# Altium PCB TrafficLight.PcbDoc
Units mil, origin at the board's own origin, x right, y up, seen from the top; angles counter-clockwise.
Board outline 2120.67 x 2088.72 mil, 2 copper layers (Top Layer, Bottom Layer); 58 components, 52 nets, 169 pads, 34 vias.
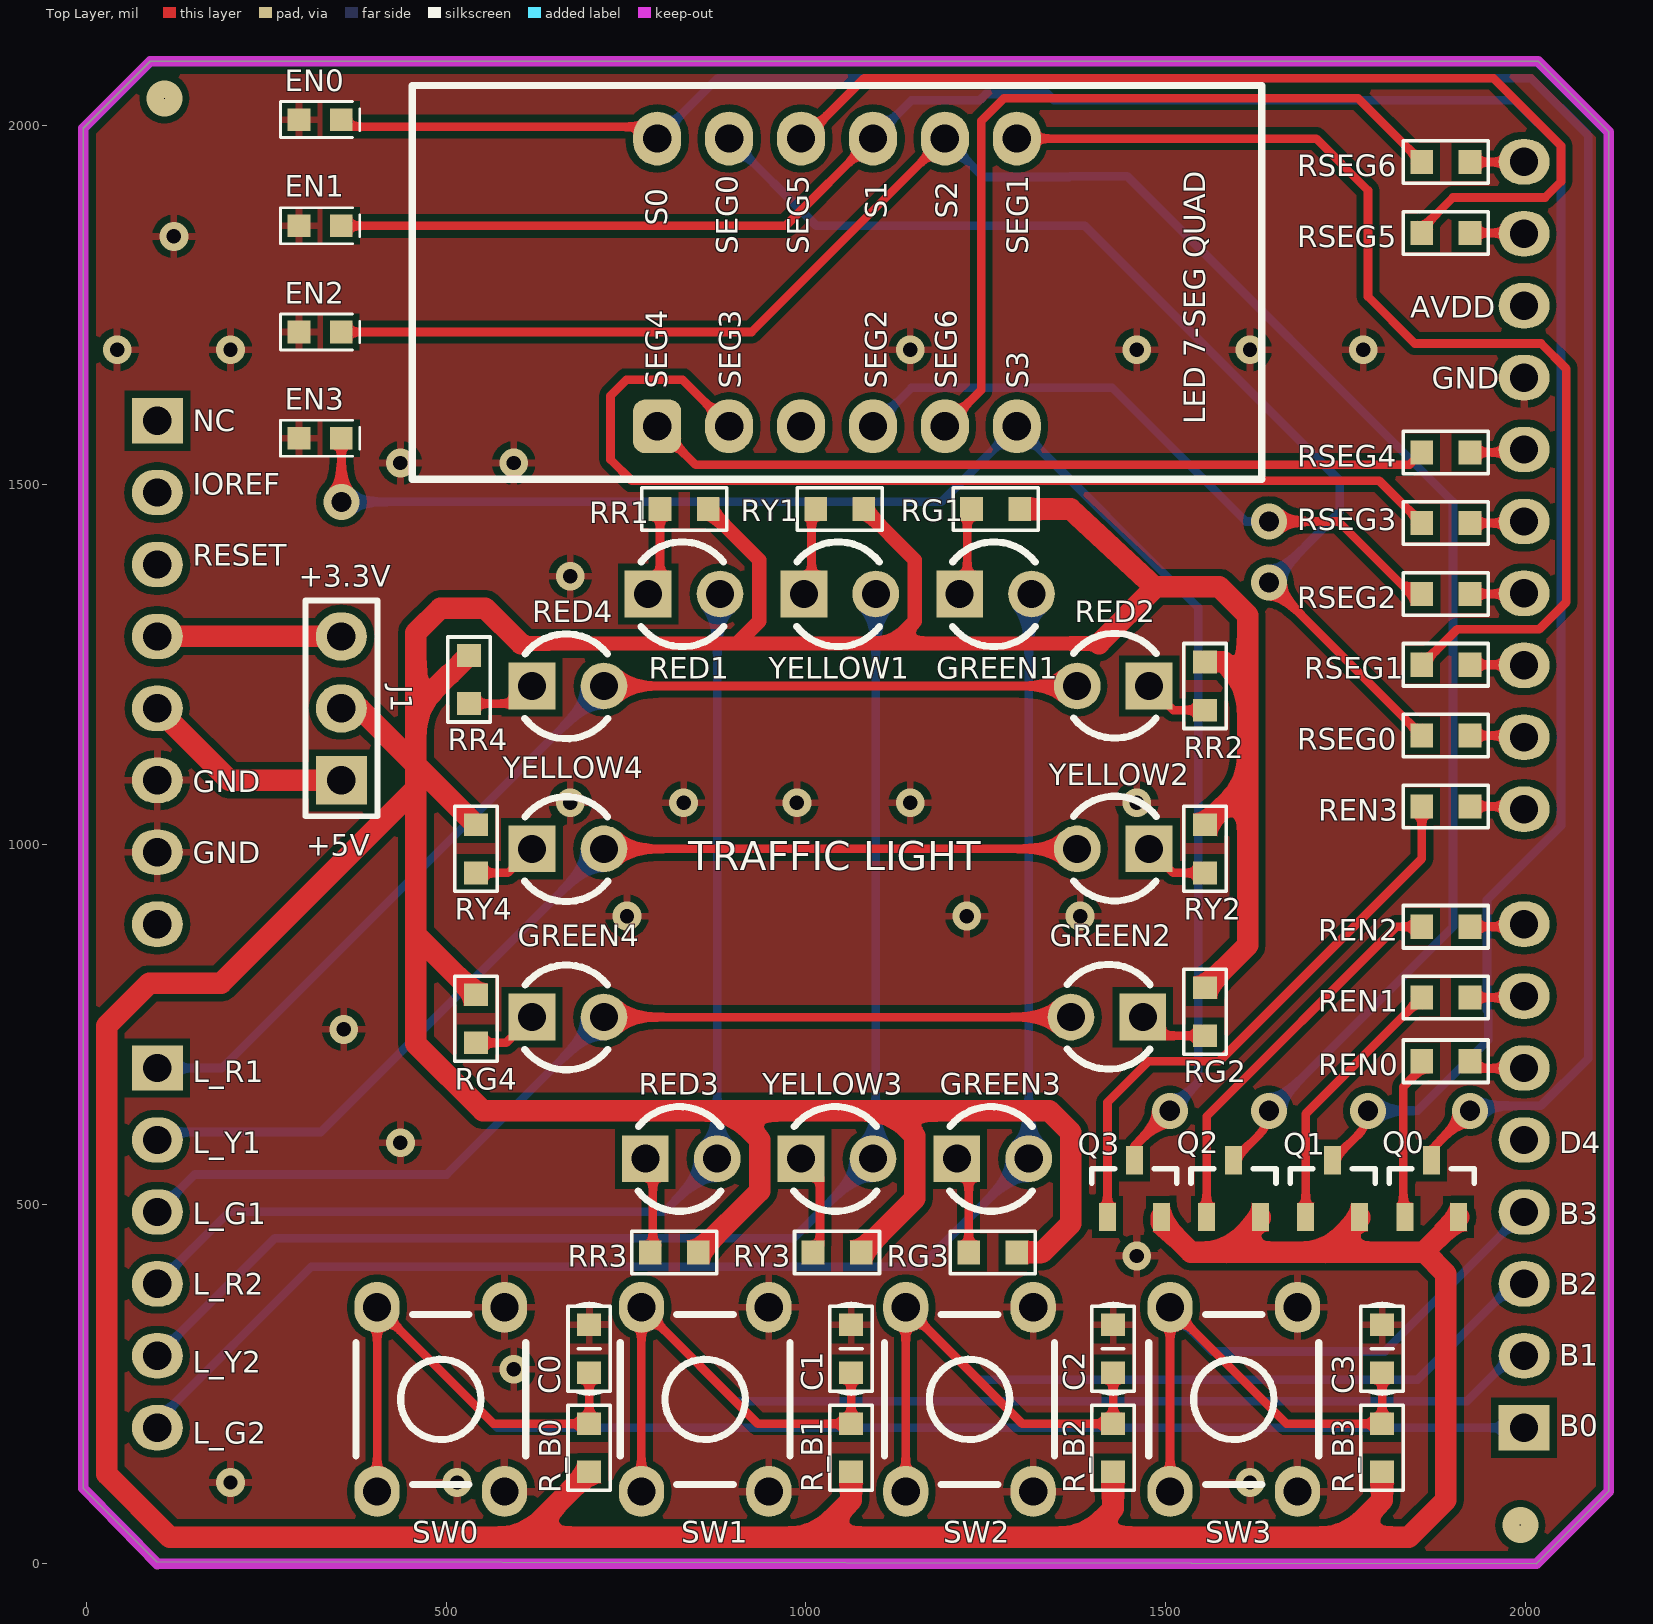
[diagram p0: Top Layer view]
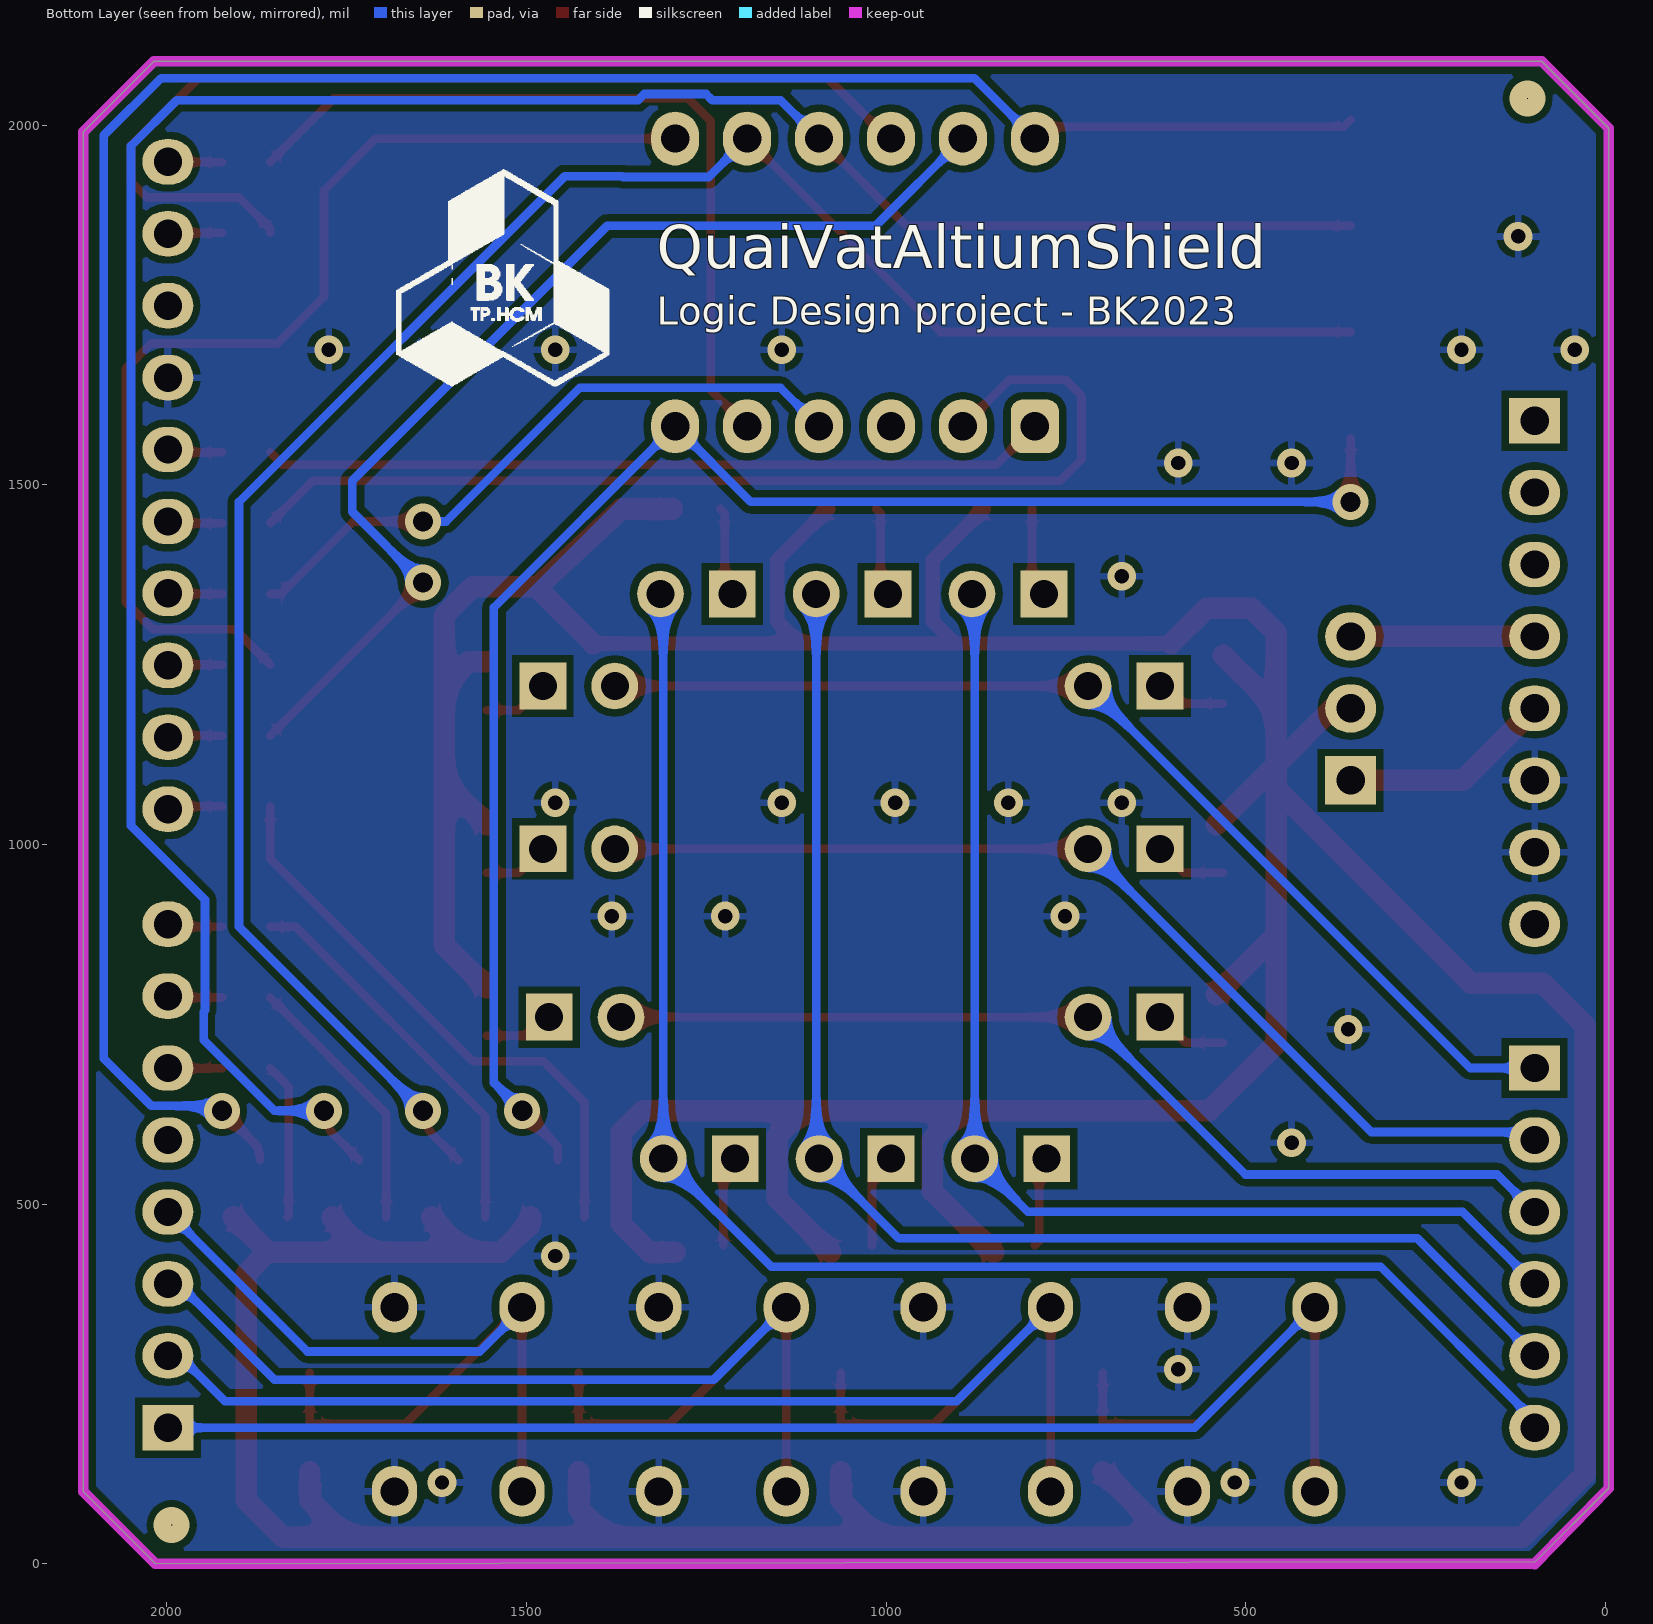
[diagram p1: Bottom Layer view, seen from below]
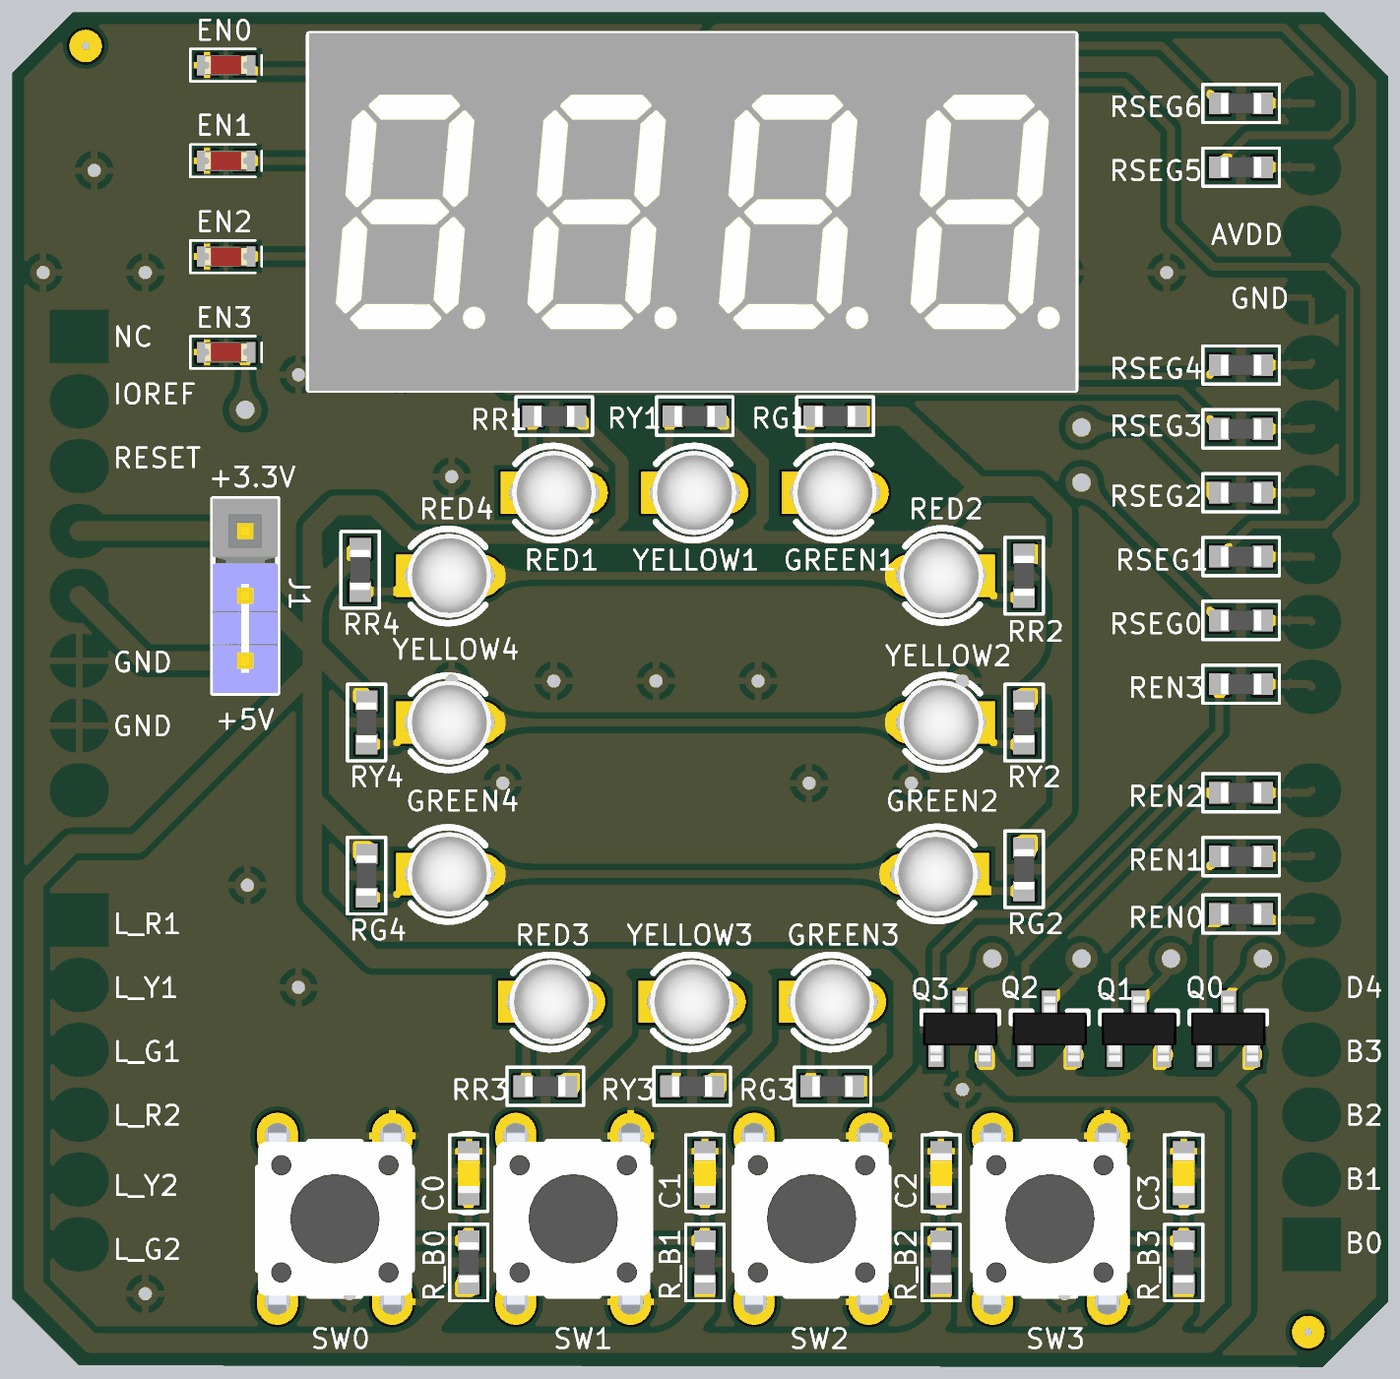
[diagram p2: 3D render of the assembled board from above, using the file's embedded part models]

## Layer stack, top to bottom
Top Solder: solder mask 0.4, Solder Resist, Dk 3.5
Top Layer: signal copper 1.4
Dielectric 1: dielectric 12.6, FR-4, Dk 4.8
Bottom Layer: signal copper 1.4
Bottom Solder: solder mask 0.4, Solder Resist, Dk 3.5

## Board outline
-4.53,105.31 -4.53,1995.87 88.58,2088.98 2017.72,2088.98 2116.14,1990.55 2116.14,100.79 2015.61,0.26 97.9,2.89

## Design rules (kind name [scope] priority, off if disabled: settings)
Clearance [All] p1: gap=10 ignorepadtopadclearanceinfootprint=FALSE except(0: Arc-Hole Track-Hole SMDPad-Hole THPad-Hole Via-Hole Fill-Hole Poly-Hole Region-Hole Text-Hole)
ComponentClearance [InComponent('Traffic Light Shield')] p1: gap=0 collisioncheckmode=3 verticalgap=0 showdistances=FALSE
PolygonConnect [All] p1: connectstyle=Relief reliefconductorwidth=10 reliefentries=4 polygonreliefangle="90 Angle" airgapwidth=10
RoutingVias [All] p1: holewidth=28 width=50 viastyle="Through Hole" minholewidth=28 minwidth=50 maxholewidth=28 maxwidth=50
SolderMaskExpansion [All] p1: expansion=4
Width [All] p1: maxlimit=30 minlimit=10 preferedwidth=12 minimp=50.000000 maximp=50.000000 favimp=50.000000
29 further rules are at their usual default settings.

## Components (designator, comment, footprint, x,y, rotation, side; value= is the part's Value field where it differs from the comment)
C0 "104" "C 0603" 698.82,299.21 r90 top
C1 "104" "C 0603" 1062.99,299.21 r90 top
C2 "104" "C 0603" 1427.17,299.21 r90 top
C3 "104" "C 0603" 1801.18,299.21 r90 top
EN0 "Led" "Led 0603 - red" 324.8,2007.87 r180 top
EN1 "Led" "Led 0603 - red" 324.8,1860.24 r180 top
EN2 "Led" "Led 0603 - red" 324.8,1712.6 r180 top
EN3 "Led" "Led 0603 - red" 324.8,1564.96 r180 top
GREEN1 "Led" "LED 3MM - green" 1263.78,1348.43 r0 top
GREEN2 "Led" "LED 3MM - green" 1418.5,760.24 r180 top
GREEN3 "Led" "LED 3MM - green" 1259.84,563.39 r0 top
GREEN4 "Led" "LED 3MM - green" 669.29,760.24 r0 top
J1 "JUMP 3" JUMP3 354.33,1089.37 r90 top
"LED 7-SEG QUAD" "LED 7-SEG QUAD" "LED/7SEG/0.36/QUAD 3641" 1043.31,1781.5 r0 top
Q0 "Transistor PNP" SOT-23 1870.08,521.65 r90 top
Q1 "Transistor PNP" SOT-23 1732.28,521.65 r90 top
Q2 "Transistor PNP" SOT-23 1594.49,521.65 r90 top
Q3 "Transistor PNP" SOT-23 1456.69,521.65 r90 top
R_B0 "10k" "R 0603" 698.82,161.42 r270 top
R_B1 "10k" "R 0603" 1062.99,161.42 r270 top
R_B2 "10k" "R 0603" 1427.17,161.42 r270 top
R_B3 "10k" "R 0603" 1801.18,161.42 r270 top
RED1 "Led" "LED 3MM - red" 830.71,1348.43 r0 top
RED2 "Led" "LED 3MM - red" 1427.17,1220.47 r180 top
RED3 "Led" "LED 3MM - red" 826.77,563.39 r0 top
RED4 "Led" "LED 3MM - red" 669.29,1220.47 r0 top
REN0 "4.7k" "R 0603" 1889.76,698.82 r180 top
REN1 "4.7k" "R 0603" 1889.76,787.4 r180 top
REN2 "4.7k" "R 0603" 1889.76,885.83 r180 top
REN3 "4.7k" "R 0603" 1889.76,1053.15 r180 top
RG1 "270" "R 0603" 1263.78,1466.54 r0 top
RG2 "270" "R 0603" 1555.12,767.72 r270 top
RG3 "270" "R 0603" 1259.84,433.07 r0 top
RG4 "220" "R 0603" 541.34,757.87 r270 top
RR1 "330" "R 0603" 830.71,1466.54 r0 top
RR2 "330" "R 0603" 1555.12,1220.47 r270 top
RR3 "330" "R 0603" 816.93,433.07 r0 top
RR4 "330" "R 0603" 531.5,1229.53 r270 top
RSEG0 "220" "R 0603" 1889.76,1151.57 r180 top
RSEG1 "220" "R 0603" 1889.76,1250 r180 top
RSEG2 "220" "R 0603" 1889.76,1348.43 r180 top
RSEG3 "220" "R 0603" 1889.76,1446.85 r180 top
RSEG4 "220" "R 0603" 1889.76,1545.28 r180 top
RSEG5 "220" "R 0603" 1889.76,1850.39 r180 top
RSEG6 "220" "R 0603" 1889.76,1948.82 r180 top
RY1 "300" "R 0603" 1047.24,1466.54 r0 top
RY2 "300" "R 0603" 1555.12,994.09 r270 top
RY3 "300" "R 0603" 1043.31,433.07 r0 top
RY4 "300" "R 0603" 541.34,994.09 r270 top
SW0 "Button" SW/4/06MM 492.52,228.74 r0 top
SW1 "Button" SW/4/06MM 859.97,228.74 r0 top
SW2 "Button" SW/4/06MM 1227.43,228.74 r0 top
SW3 "Button" SW/4/06MM 1594.88,228.74 r0 top
"TRAFFIC LIGHT" "NUCLEO-F103RB" NUCLEO -329.53,69.68 r0 top locked
YELLOW1 "Led" "LED 3MM - yellow" 1047.24,1348.43 r0 top
YELLOW2 "Led" "LED 3MM - yellow" 1427.17,994.09 r180 top
YELLOW3 "Led" "LED 3MM - yellow" 1043.31,563.39 r0 top
YELLOW4 "Led" "LED 3MM - yellow" 669.29,994.09 r0 top

## Footprints (in the part's own frame and the unit in brackets; to place one, negate y for a bottom-side part, rotate by r counter-clockwise, add the part's x,y. Pads: shape width x height; smd on the part's side, far side on the other; paste and mask are expansions set on the pad)
"C 0603" [mm] "Chip Capacitor, 2-Leads, Body 1.6x0.8mm, IPC Medium Density"
  rect 0.8x0.85 smd: 1(-0.85,0) 2(0.85,0)
  silkscreen extent -1.6,-0.75 1.6,0.75, body extent -0.8,-0.43 0.8,0.43, height 0.81
JUMP3 [mm]
  rect 1.7x1.8 hole 1: 1(0,0)
  oval 1.7x1.8 hole 1: 2(2.54,0) 3(5.08,0)
  silkscreen extent -1.27,-1.27 6.35,1.27, body extent -1.27,-1.27 6.35,1.27, height 8.89
"LED 3MM - green" [mil]
  rect 65x65 hole 39: 1(-50,0)
  round 65 hole 39: 2(50,0)
  silkscreen extent -60,-73 55,72, body extent -66,-65 64,65, height 207
"LED 3MM - red" [mil]
  rect 65x65 hole 39: 1(-50,0)
  round 65 hole 39: 2(50,0)
  silkscreen extent -60,-73 55,72, body extent -66,-65 64,65, height 207
"LED 3MM - yellow" [mil]
  rect 65x65 hole 39: 1(-50,0)
  round 65 hole 39: 2(50,0)
  silkscreen extent -60,-73 55,72, body extent -66,-65 64,65, height 207
"Led 0603 - red" [mm] "Led SMD 0603"
  rect 0.8x0.8 smd: 1(-0.75,0) 2(0.75,0)
  silkscreen extent -1.4,-0.64 1.4,0.64, body extent -0.81,-0.4 0.81,0.4, height 0.6
"LED/7SEG/0.36/QUAD 3641" [mm]
  rrect50% 1.7x1.9 hole 1: 1(-6.35,-5.08)
  oval 1.7x1.9 hole 1: 2(-3.81,-5.08) 3(-1.27,-5.08) 4(1.27,-5.08) 5(3.81,-5.08) 6(6.35,-5.08) 7(6.35,5.08) 8(3.81,5.08) 9(1.27,5.08) 10(-1.27,5.08) 11(-3.81,5.08) 12(-6.35,5.08)
  silkscreen extent -15,-6.95 15,6.95, body extent -14.99,-7 15.01,7, height 7.1
NUCLEO [mm]
  oval 1.8x1.6 hole 1: A5_1(59.13,24.88) A5_2(59.13,27.42) A5_3(59.13,29.96) A5_4(59.13,32.5) A5_5(59.13,35.04) A5_6(59.13,37.58) A5_7(59.13,40.12) A5_8(59.13,42.66) A5_9(59.13,45.2) A5_10(59.13,47.74) A6_2(10.87,36.06) A6_3(10.87,33.52) A6_4(10.87,30.98) A6_5(10.87,28.44) A6_6(10.87,25.9) A6_7(10.87,23.36) A6_8(10.87,20.82) A8_2(10.87,13.2) A8_3(10.87,10.66) A8_4(10.87,8.12) A8_5(10.87,5.58) A8_6(10.87,3.04) A9_2(59.13,5.58) A9_3(59.13,8.12) A9_4(59.13,10.66) A9_5(59.13,13.2) A9_6(59.13,15.74) A9_7(59.13,18.28) A9_8(59.13,20.82)
  rect 1.8x1.6 hole 1: A6_1(10.87,38.6) A8_1(10.87,15.74) A9_1(59.13,3.04)
  Keep-Out Layer lines w0.381: 8.255,0.905 8.255,48.925 10.62,51.29 ; 59.566,-1.764 62.12,0.79 62.12,48.79 59.62,51.29
"R 0603" [mm] "Chip Resistor, 2-Leads, Body 1.6x0.8mm, IPC Medium Density"
  rect 0.8x0.85 smd: 1(-0.85,0) 2(0.85,0)
  silkscreen extent -1.5,-0.75 1.5,0.75, body extent -0.8,-0.4 0.8,0.4, height 0.5
SOT-23 [mm] "SOT23, 3-Leads, Body 3.0x2.5mm (max), Pitch 0.95mm, IPC Medium Density"
  rect 1x0.6 smd: 1(-1,0.95) 2(-1,-0.95) 3(1,0)
  silkscreen extent 0.2,-1.5 0.7,1.5, body extent -1.28,-1.46 1.27,1.46, height 0.95
SW/4/06MM [mm]
  oval 1.6x1.8 hole 1: 1(-2.25,3.25) 2(-2.25,-3.25) 3(2.25,-3.25) 4(2.25,3.25)
  silkscreen extent -3,-3 3,3, body extent -3.01,-3.87 3.02,3.87, height 5.01

## Part data
C0 C1 C2 C3: library part "Capacitor NP", "Capacitor non-pol"
EN0 EN1 EN2 EN3 GREEN1 GREEN2 GREEN3 GREEN4 RED1 RED2 RED3 RED4 YELLOW1 YELLOW2 YELLOW3 YELLOW4: "Typical LED"
"LED 7-SEG QUAD": library part "LED 7-SEG QUAD 0.36inch", "LED 7-SEG 0.36 QUAD RED"
Q0 Q1 Q2 Q3: "PNP Bipolar Transistor"
R_B0 R_B1 R_B2 R_B3 REN0 REN1 REN2 REN3 RG1 RG2 RG3 RG4 RR1 RR2 RR3 RR4 RSEG0 RSEG1 RSEG2 RSEG3 RSEG4 RSEG5 RSEG6 RY1 RY2 RY3 RY4: library part Resistor, "Resistor"
SW0 SW1 SW2 SW3: library part "SW SPST 4-pin", "Tact switch 4-pin"
"TRAFFIC LIGHT": library part "NUCLEO_Adruino only", "STM32F103RB, mbed-Enabled Development Nucleo-64 STM32F1 ARM® Cortex®-M3 MCU 32-Bit Embedded Evaluation Board", Manufacturer=STMicroelectronics, BRAND=STMicroelectronics, Manufacturer Product Number=NUCLEO-F103RB, PART NO=NUCLEO-F103RB, STOCK CODE=497-14362-ND, SUPPLIER=digi-key, TYPE="EVAL BRD"

## Via types
v1: diameter 40, hole 20, Top Layer to Bottom Layer, tented both sides, 25 vias
v2: diameter 50, hole 28, Top Layer to Bottom Layer, tented both sides, 7 vias
v3: diameter 50, hole 0, Top Layer to Bottom Layer, 2 vias

## Nets (pads, with @x,y where several pads share a name; then routed paths per layer and width w, separated by ;. In a path a pad name is that pad's centre, name@x,y a point inside that pad or via, vN(x,y) a via of type N, cw(c..) or ccw(c..) an arc to the next point about the centre after c; other vN are vias at no path point)
+3.3V: "TRAFFIC LIGHT.A6_4" J1.3 | length 255.9
  Top Layer w30: 98.43,1289.37 J1.3
+5V: "TRAFFIC LIGHT.A6_5" J1.1 | length 297.3
  Top Layer w30: 98.43,1189.37 198.43,1089.37 J1.1
BUTTON_0: "TRAFFIC LIGHT.A9_1" C0.1 R_B0.1 SW0.1 SW0.2 | length 2352.5
  Top Layer w12: SW0.2 SW0.1 565.75,194.88 R_B0.1 C0.1
  Bottom Layer w12: SW0.1 571.26,189.37 1998.43,189.37
BUTTON_1: "TRAFFIC LIGHT.A9_2" C1.1 R_B1.1 SW1.1 SW1.2 | length 1992.5
  Top Layer w12: SW1.2 SW1.1 933.2,194.88 R_B1.1 C1.1
  Bottom Layer w12: SW1.1 901.71,226.38 1919.29,226.38 1982.28,289.37 1998.43,289.37
BUTTON_2: "TRAFFIC LIGHT.A9_3" C2.1 R_B2.1 SW2.1 SW2.2 | length 1638.7
  Top Layer w12: SW2.2 SW2.1 1300.66,194.88 R_B2.1 C2.1
  Bottom Layer w12: SW2.1 1239.63,255.91 1850.39,255.91 1983.86,389.37 1998.43,389.37
BUTTON_3: "TRAFFIC LIGHT.A9_4" C3.1 R_B3.1 SW3.1 SW3.2 | length 1288.3
  Top Layer w12: SW3.2 SW3.1 1668.11,194.88 R_B3.1 C3.1
  Bottom Layer w12: SW3.1 1506.3,353.94 1564.96,295.28 1804.33,295.28 1998.43,489.37
EN0: "TRAFFIC LIGHT.A9_6" REN0.1 | length 75.4
  Top Layer w12: REN0.1@1923.23,688.98 1998.03,688.98 1998.43,689.37
EN1: "TRAFFIC LIGHT.A9_7" REN1.1 | length 76
  Top Layer w12: REN1.1 1996.46,787.4 1998.43,789.37
EN2: "TRAFFIC LIGHT.A9_8" REN2.1 | length 76.7
  Top Layer w12: REN2.1 1994.88,885.83 1998.43,889.37
EN3: "TRAFFIC LIGHT.A5_1" REN3.1 | length 76.8
  Top Layer w12: REN3.1 1994.49,1053.15 1998.43,1049.21
GND: "TRAFFIC LIGHT.A5_7" "TRAFFIC LIGHT.A6_6" "TRAFFIC LIGHT.A6_7" C0.2 C1.2 C2.2 C3.2 EN0.2 EN1.2 EN2.2 EN3.2 SW0.3 SW0.4 SW1.3 SW1.4 SW2.3 SW2.4 SW3.3 SW3.4
  other v1: 200.16,113.19 515.12,113.19 1617.48,113.19 593.86,270.67 1460,428.15 436.38,585.63 357.64,743.11 751.34,900.59 1223.78,900.59 1381.26,900.59 672.6,1058.07 830.08,1058.07 987.56,1058.07 1145.04,1058.07 1460,1058.07 672.6,1373.03 436.38,1530.51 593.86,1530.51 42.68,1687.99 200.16,1687.99 1145.04,1687.99 1460,1687.99 1617.48,1687.99 1774.96,1687.99 121.42,1845.47
LED_GREEN1: "TRAFFIC LIGHT.A8_6" GREEN1.2 GREEN3.2 | length 2158.8
  Bottom Layer w12: 98.43,189.37 98.43,199.21 312.6,413.39 1159.84,413.39 GREEN3.2 1309.84,1344.49 GREEN1.2
LED_GREEN2: "TRAFFIC LIGHT.A8_3" GREEN2.2 GREEN4.2 | length 1382.3
  Top Layer w12: GREEN4.2 GREEN2.2
  Bottom Layer w12: 98.43,489.37 150.39,541.34 500.39,541.34 GREEN4.2
LED_RED1: "TRAFFIC LIGHT.A8_4" RED1.2 RED3.2 | length 1637.1
  Bottom Layer w12: 98.43,389.37 198.43,489.37 802.76,489.37 RED3.2 876.77,1344.49 RED1.2
LED_RED2: "TRAFFIC LIGHT.A8_1" RED2.2 RED4.2 | length 1498.7
  Top Layer w12: RED4.2 RED2.2
  Bottom Layer w12: 98.43,689.37 188.19,689.37 RED4.2
LED_YELLOW1: "TRAFFIC LIGHT.A8_5" YELLOW1.2 YELLOW3.2 | length 1895.1
  Bottom Layer w12: 98.43,289.37 261.81,452.76 982.68,452.76 YELLOW3.2 1097.24,567.32 YELLOW1.2
LED_YELLOW2: "TRAFFIC LIGHT.A8_2" YELLOW2.2 YELLOW4.2 | length 1446.4
  Top Layer w12: YELLOW4.2 YELLOW2.2
  Bottom Layer w12: 98.43,589.37 107.09,589.37 118.11,600.39 325.59,600.39 YELLOW4.2
NetGREEN1_1: GREEN1.1 RG1.1 | length 125
  Top Layer w12: GREEN1.1 1224.41,1359.06 1224.41,1460.63 RG1.1
NetGREEN2_1: GREEN2.1 RG2.2 | length 97.4
  Top Layer w12: GREEN2.1 1494.49,734.25 RG2.2
NetGREEN3_1: GREEN3.1 RG3.1 | length 127.3
  Top Layer w12: GREEN3.1 1226.38,546.85 RG3.1@1226.38,442.91
NetGREEN4_1: GREEN4.1 RG4.2 | length 102.6
  Top Layer w12: RG4.2@531.5,724.41 583.46,724.41 GREEN4.1
"NetLED 7-SEG QUAD_1": "LED 7-SEG QUAD.1" RSEG4.2 | length 1092.2
  Top Layer w12: 793.31,1581.5 846.71,1528.09 1839.12,1528.09 RSEG4.2
"NetLED 7-SEG QUAD_2": "LED 7-SEG QUAD.2" RSEG3.2 | length 1454.2
  Top Layer w12: 893.31,1581.5 828.57,1646.23 750.56,1646.23 728.35,1624.02 728.35,1535.43 757.87,1505.91 1797.24,1505.91 RSEG3.2
"NetLED 7-SEG QUAD_4": "LED 7-SEG QUAD.4" RSEG2.2 | length 903.8
  Top Layer w12: v2(1643.7,1449.21) 1740.55,1449.21 1841.34,1348.43 RSEG2.2
  Bottom Layer w12: 1093.31,1581.5 1146.71,1634.9 1426.13,1634.9 1611.81,1449.21 v2(1643.7,1449.21)
"NetLED 7-SEG QUAD_5": "LED 7-SEG QUAD.5" RSEG6.2 | length 1107.5
  Top Layer w12: 1193.31,1581.5 1243.84,1632.03 1243.84,2005.92 1275.32,2037.4 1767.72,2037.4 RSEG6.2
"NetLED 7-SEG QUAD_7": "LED 7-SEG QUAD.7" RSEG1.2 | length 1544.4
  Top Layer w12: 1293.31,1981.5 1709.45,1981.5 1781.5,1909.45 1781.5,1761.81 1846.6,1696.71 2022.04,1696.71 2057.09,1661.66 2057.09,1336.77 2019.53,1299.21 1905.51,1299.21 RSEG1.2
"NetLED 7-SEG QUAD_10": "LED 7-SEG QUAD.10" RSEG5.2 | length 1404.7
  Top Layer w12: 1009.65,1974.21 1009.65,1993.9 1081.22,2065.48 1955.88,2065.48 2049.86,1971.5 2049.86,1921.91 2027.56,1899.61 1899.61,1899.61 1856.3,1856.3 RSEG5.2
"NetLED 7-SEG QUAD_11": "LED 7-SEG QUAD.11" RSEG0.2 | length 1529
  Top Layer w12: v2(1643.7,1364.17) RSEG0.2
  Bottom Layer w12: 893.31,1981.5 1014.57,1860.24 1387.8,1860.24 1742.13,1505.91 1742.13,1462.6 v2(1643.7,1364.17)
NetQ0_1: Q0.1 REN0.2 | length 218.1
  Top Layer w12: Q0.1 1830.71,484.25 1830.71,663.39 REN0.2@1856.3,688.98
NetQ1_1: Q1.1 REN1.2 | length 372
  Top Layer w12: Q1.1 1694.88,625.98 REN1.2
NetQ2_1: Q2.1 REN2.2 | length 548.2
  Top Layer w12: Q2.1 1557.09,622.05 1820.87,885.83 REN2.2
NetQ3_1: Q3.1 REN3.2 | length 809.5
  Top Layer w12: Q3.1 1419.29,641.73 1476.38,698.82 1574.8,698.82 1856.3,980.32 REN3.2
NetRED1_1: RED1.1 RR1.1 | length 125
  Top Layer w12: RED1.1 797.24,1364.96 RR1.1
NetRED2_1: RED2.1 RR2.2 | length 91.8
  Top Layer w12: RED2.1 1510.63,1187.01 RR2.2
NetRED3_1: RED3.1 RR3.1 | length 127.3
  Top Layer w12: RED3.1 787.4,552.76 787.4,448.82 RR3.1@793.31,442.91
NetRED4_1: RED4.1 RR4.2 | length 97.9
  Top Layer w12: RR4.2 594.88,1196.06 RED4.1
NetRY1_1: RY1.1 YELLOW1.1 | length 125
  Top Layer w12: YELLOW1.1 1007.87,1359.06 1007.87,1460.63 RY1.1
NetRY2_2: RY2.2 YELLOW2.1 | length 91.8
  Top Layer w12: YELLOW2.1 1510.63,960.63 RY2.2
NetRY3_1: RY3.1 YELLOW3.1 | length 131.4
  Top Layer w12: YELLOW3.1 1019.68,537.01 RY3.1@1019.68,442.91
NetRY4_2: RY4.2 YELLOW4.1 | length 101.7
  Top Layer w12: RY4.2@531.5,960.63 585.83,960.63 YELLOW4.1
S0: "LED 7-SEG QUAD.12" EN0.1 Q0.3 | length 3378.8
  Top Layer w12: EN0.1 364.17,1998.03 776.77,1998.03 793.31,1981.5 ; Q0.3 cw(c1908.1,561.02) 1881.21,587.9 ; 1881.21,587.91 v2(1923.23,629.92)
  Bottom Layer w12: 793.31,1981.5 877.29,2065.48 2007.98,2065.48 2087.5,1985.96 2087.5,702.66 2021.71,636.87 1930.17,636.87 v2(1923.23,629.92)
S1: "LED 7-SEG QUAD.9" EN1.1 Q1.3 | length 3382.9
  Top Layer w12: EN1.1 972.05,1860.24 1093.31,1981.5 ; Q1.3 1767.58,596.32 ccw(c1733.97,629.92) v2(1781.5,629.92)
  Bottom Layer w12: 1093.31,1981.5 1146.71,2034.9 1241.71,2034.9 1250.28,2043.48 1336.33,2043.48 1344.91,2034.9 1986.08,2034.9 2049.86,1971.12 2049.86,1026.24 1946.99,923.37 1946.99,769.7 1948.82,767.87 1948.82,728.35 1850.39,629.92 v2(1781.5,629.92)
S2: "LED 7-SEG QUAD.8" EN2.1 Q2.3 | length 2906.4
  Top Layer w12: EN2.1 924.41,1712.6 1193.31,1981.5 ; Q2.3 1629.78,596.32 ccw(c1596.18,629.92) v2(1643.7,629.92)
  Bottom Layer w12: 1193.31,1981.5 1246.71,1928.09 1366.16,1928.09 1367.2,1929.13 1446.85,1929.13 1899.61,1476.38 1899.61,885.83 v2(1643.7,629.92)
S3: "LED 7-SEG QUAD.6" EN3.1 Q3.3 | length 2246.6
  Top Layer w12: v2(354.33,1476.38) EN3.1 ; Q3.3 1456.69,580.71 v2(1505.91,629.92)
  Bottom Layer w12: v2(354.33,1476.38) 1188.19,1476.38 1293.31,1581.5 1545.28,1329.53 1545.28,669.29 v2(1505.91,629.92) v2@1496.06,620.08
SEG0: "TRAFFIC LIGHT.A5_2" RSEG0.1 | length 76.2
  Top Layer w12: RSEG0.1 1996.06,1151.57 1998.43,1149.21
SEG1: "TRAFFIC LIGHT.A5_3" RSEG1.1 | length 75.5
  Top Layer w12: RSEG1.1 1997.64,1250 1998.43,1249.21
SEG2: "TRAFFIC LIGHT.A5_4" RSEG2.1 | length 75.5
  Top Layer w12: RSEG2.1 1997.64,1348.43 1998.43,1349.21
SEG3: "TRAFFIC LIGHT.A5_5" RSEG3.1 | length 76.2
  Top Layer w12: RSEG3.1 1996.06,1446.85 1998.43,1449.21
SEG4: "TRAFFIC LIGHT.A5_6" RSEG4.1 | length 76.8
  Top Layer w12: RSEG4.1 1994.49,1545.28 1998.43,1549.21
SEG5: "TRAFFIC LIGHT.A5_9" RSEG5.1 | length 75.7
  Top Layer w12: RSEG5.1 1997.24,1850.39 1998.43,1849.21
SEG6: "TRAFFIC LIGHT.A5_10" RSEG6.1 | length 75.4
  Top Layer w12: RSEG6.1 1998.03,1948.82 1998.43,1949.21
VCC: J1.2 Q0.2 Q1.2 Q2.2 Q3.2 R_B0.2 R_B1.2 R_B2.2 R_B3.2 RG1.2 RG2.1 RG3.2 RG4.1 RR1.2 RR2.1 RR3.2 RR4.1 RY1.2 RY2.1 RY3.2 RY4.1 | length 9869.3
  Top Layer w20: 603.5,1279.53 905.51,1279.53 ; RR1.2 935.04,1395.67 935.04,1310.61 905.51,1281.08 905.51,1279.53 ; RY1.2 1151.57,1395.67 1151.57,1310.61 1120.49,1279.53 ; 1407.48,1279.53 1120.49,1279.53 ; 905.51,1279.53 1120.49,1279.53
  Top Layer w30: J1.2 379.53,1189.37 457.87,1111.02 ; RR4.1 505.32,1236.81 504.41,1236.81 489.76,1222.17 489.76,1221.26 457.87,1189.37 ; RG4.1 457.87,874.8 ; RY4.1 457.87,1111.02 ; 603.5,1279.53 554.29,1328.74 492.13,1328.74 457.87,1294.49 457.87,1189.37 ; R_B0.2 608.07,37.2 ; RR3.2 935.81,518.48 935.81,589.78 895.67,629.92 ; R_B1.2 1062.99,88.58 1011.61,37.2 ; RY3.2 1151.57,507.87 1151.57,595.47 1117.13,629.92 ; RG3.2 1328.74,433.07 1368.5,472.83 1368.5,600 1338.58,629.92 1117.13,629.92 ; RG1.2@1297.24,1467.44 RG1.2 1368.11,1466.54 1484.67,1358.27 ; 1407.48,1279.53 1486.22,1358.27 1574.8,1358.27 1614.17,1318.9 1614.17,1220.47 ; R_B2.2 1427.17,76.77 1387.59,37.2 ; Q3.2 1494.09,474.41 1535.43,433.07 1584.65,433.07 ; RG2.1 1614.17,860.24 1614.17,1086.61 ; RY2.1 1614.17,1086.61 ; RR2.1 1580.71,1253.94 1614.17,1220.47 ; Q2.2 1631.89,480.31 1584.65,433.07 ; Q1.2 1769.69,480.31 1722.44,433.07 ; R_B3.2 1801.18,88.58 1749.8,37.2 ; Q0.2 1860.24,435.04 1860.24,433.07 ; 457.87,874.8 457.87,1077.95 ; 457.87,874.8 457.87,723.23 551.18,629.92 895.67,629.92 ; 457.87,1077.95 457.87,1111.02 ; 457.87,1077.95 187.01,807.09 87.03,807.09 27.97,748.03 27.97,125.08 115.85,37.2 608.07,37.2 ; 457.87,1111.02 457.87,1189.37 ; 608.07,37.2 1011.61,37.2 ; 895.67,629.92 1117.13,629.92 ; 1011.61,37.2 1387.59,37.2 ; 1387.59,37.2 1749.8,37.2 ; 1584.65,433.07 1722.44,433.07 ; 1614.17,1086.61 1614.17,1220.47 ; 1722.44,433.07 1860.24,433.07 ; 1749.8,37.2 1838.38,37.2 1889.76,88.58 1889.76,403.54 1860.24,433.07
pads on no net: "LED 7-SEG QUAD.3" "TRAFFIC LIGHT.A5_8" "TRAFFIC LIGHT.A6_1" "TRAFFIC LIGHT.A6_2" "TRAFFIC LIGHT.A6_3" "TRAFFIC LIGHT.A6_8" "TRAFFIC LIGHT.A9_5"
copper on no net:
  other v3: 1993.19,54.06 108.27,2037.4

## Polygon pours and split planes (outlines as drawn)
GND on Top Layer "GND_L01_P008" (solid, remove dead copper, pour order 8): -4.53,1995.87 88.58,2088.98 2007.87,2088.98 2007.87,2086.61 2116.14,1978.35 2116.14,100.79 2015.35,0 98.43,0 98.43,2.36 -4.53,105.31
GND on Bottom Layer "GND_L02_P012" (solid, remove dead copper, pour order 12): 2017.72,2088.98 2116.14,1990.55 2116.14,100.79 2015.61,0.26 2006.02,9.84 103.74,9.84 -4.53,118.11 -4.53,1995.87 7.68,1995.87 88.58,2076.77

## Keep-outs
Keep-Out Layer:
  lines w15: -4.53,105.31 98.43,0 2015.61,0.26 ; 88.58,2088.98 2017.72,2088.98

## Silkscreen, mask and mechanical layers (free items; w line width, h text height)
Top Overlay:
  text "S1" at 1112.2,1870.08 h30 r90
  text "S2" at 1210.63,1870.08 h30 r90
  text "S0" at 807.09,1860.24 h30 r90
  text "SEG0" at 905.51,1820.87 h30 r90
  text "SEG5" at 1003.94,1820.87 h30 r90
  text "SEG1" at 1309.06,1820.87 h30 r90
  text "AVDD" at 1840.55,1732.28 h30
  text "SEG4" at 807.09,1633.86 h30 r90
  text "SEG3" at 909.19,1633.86 h30 r90
  text "SEG2" at 1112.2,1633.86 h30 r90
  text "SEG6" at 1209.84,1633.86 h30 r90
  text "S3" at 1309.06,1633.86 h30 r90
  text "GND" at 1870.08,1633.86 h30
  text "NC" at 147.64,1574.8 h30
  text "IOREF" at 147.64,1486.22 h30
  text "RESET" at 147.64,1387.8 h30
  text "+3.3V" at 295.28,1358.27 h30
  text "GND" at 147.64,1072.83 h30
  text "+5V" at 305.12,984.25 h30
  text "GND" at 147.64,974.41 h30
  text "L_R1" at 147.64,669.29 h30
  text "L_Y1" at 147.64,570.87 h30
  text "D4" at 2047.24,570.87 h30
  text "L_G1" at 147.64,472.44 h30
  text "B3" at 2047.24,472.44 h30
  text "L_R2" at 147.64,374.02 h30
  text "B2" at 2047.24,374.02 h30
  text "B1" at 2047.24,275.59 h30
  text "L_Y2" at 147.64,265.75 h30
  text "B0" at 2047.24,177.17 h30
  text "L_G2" at 147.64,167.32 h30
Bottom Overlay:
  drawing of 1060 lines, arcs and shapes, not listed
  text "QuaiVatAltiumShield" at 1318.9,1801.18 h60
  text "Logic Design project - BK2023" at 1318.9,1722.44 h39